# Altium PCB PCB_DIY.PcbDoc
Units mm, origin at the board's own origin, x right, y up, seen from the top; angles counter-clockwise.
Board outline 90 x 70 mm, 2 copper layers (Top Layer, Bottom Layer); 12 components, 10 nets, 77 pads, 0 vias.
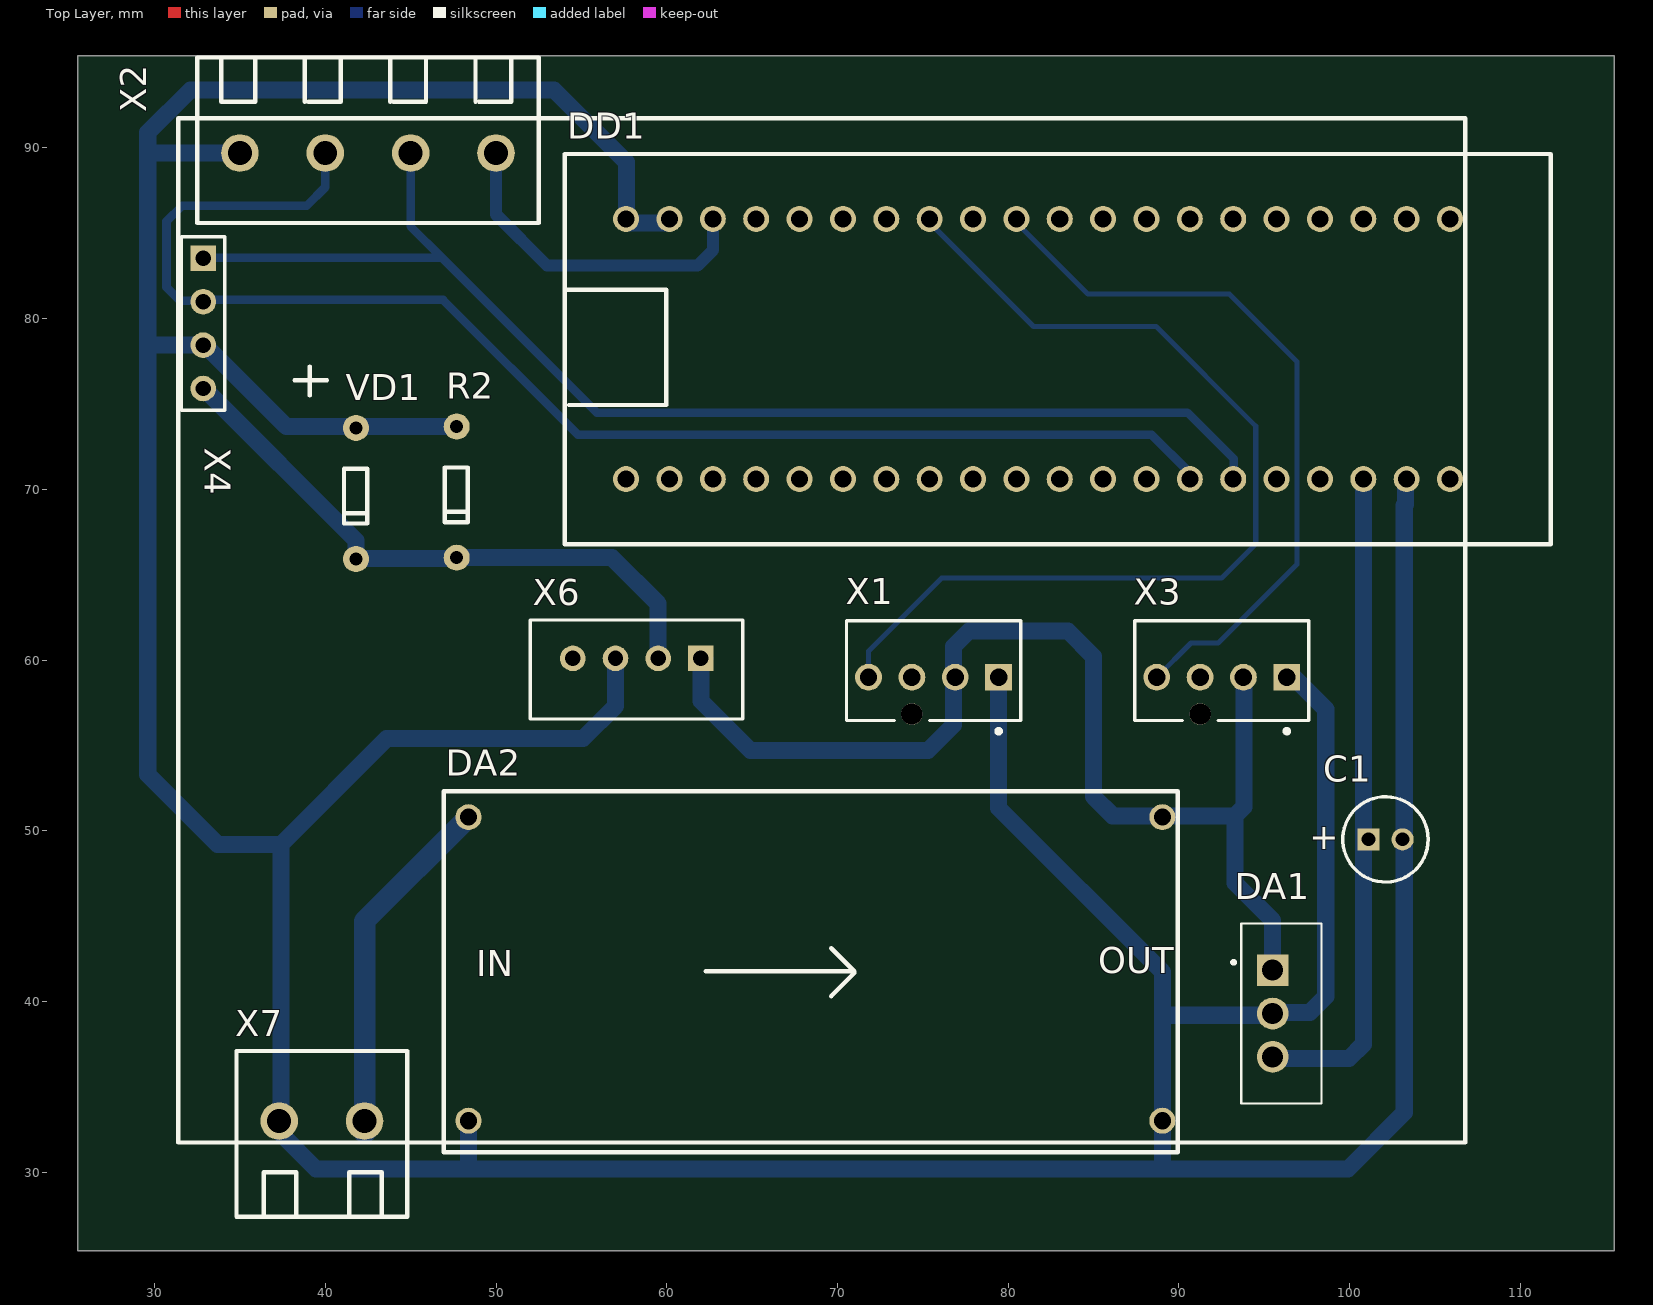
[diagram p0: Top Layer view]
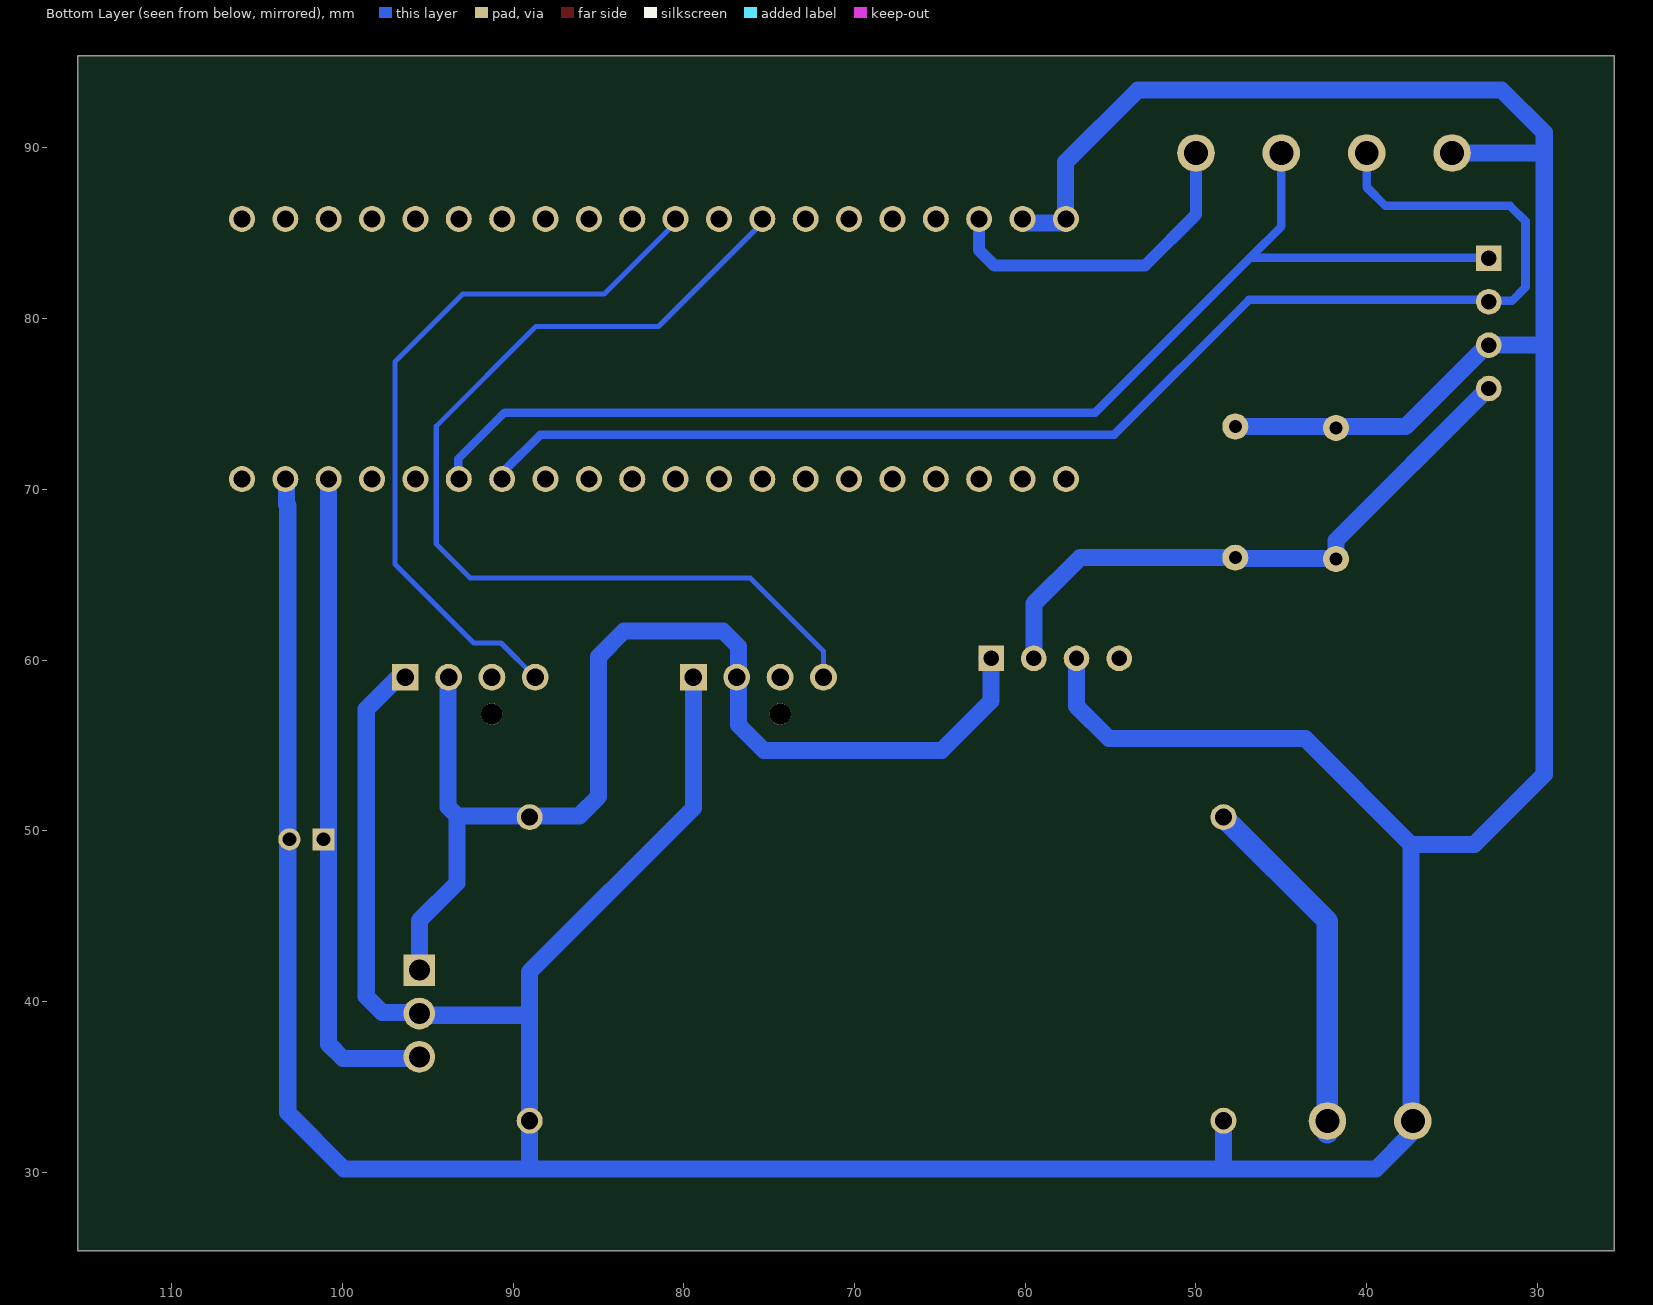
[diagram p1: Bottom Layer view, seen from below]

## Layer stack, top to bottom
Top Solder: solder mask 0.0102, Solder Resist, Dk 3.5
Top Layer: signal copper 0.0356
Dielectric 1: dielectric 0.32, FR-4, Dk 4.8
Bottom Layer: signal copper 0.0356
Bottom Solder: solder mask 0.0102, Solder Resist, Dk 3.5

## Board outline
25.5,25.4 25.5,95.4 115.5,95.4 115.5,25.4

## Design rules (kind name [scope] priority, off if disabled: settings)
Clearance [All] p1: gap=0.1 ignorepadtopadclearanceinfootprint=FALSE except(0: Arc-Hole Track-Hole SMDPad-Hole THPad-Hole Via-Hole Fill-Hole Poly-Hole Region-Hole Text-Hole)
PolygonConnect [All] p1: connectstyle=Relief reliefconductorwidth=0.254 reliefentries=4 polygonreliefangle="90 Angle" airgapwidth=0.254
RoutingVias [All] p1: holewidth=0.711 width=1.27 viastyle="Through Hole" minholewidth=0.711 minwidth=1.27 maxholewidth=0.711 maxwidth=1.27
SolderMaskExpansion [All] p1: expansion=0.102
Width [All] p1: maxlimit=10.254 minlimit=0.254 preferedwidth=0.254
30 further rules are at their usual default settings.

## Components (designator, comment, footprint, x,y, rotation, side; value= is the part's Value field where it differs from the comment)
C1 "K50-35 1uF" "K50-35 5x11x2" 102.1,49.5 r180 top
DA1 "КР142ЕН5А" TO220-short 96,39.3 r270 top
DA2 "DC_DC_LM2596HVS" DC_DC_LM2596HVS 48.387,33.02 r0 top
DD1 "STM32F103_BLUEPILL" STM32F103_BLUEPILL 105.88,85.84 r90 top
R2 "7.5k 1%" THROU_HOLE2.54 47.7,73.68 r270 top
VD1 "BZX55C3V3" THROU_HOLE2.54 41.8,73.6 r270 top
X1 "Conn_Molex_47053-1000_eec" Molex_47053-1000_0 75.63,59.38 r90 top
X2 "300-041-12" 300-041-12 35,89.7 r0 top
X3 "" Molex_47053-1000_0 92.51,59.38 r90 top
X4 "DS1021_1x4" PLD1X4 32.85,83.53 r270 top
X6 "DS1069-4M" "DS1069-4 CWF-4 CONNFLY" 62,60.1 r180 top
X7 "300-021-12" 300-021-12 42.3,33 r180 top

## Footprints (in the part's own frame and the unit in brackets; to place one, negate y for a bottom-side part, rotate by r counter-clockwise, add the part's x,y. Pads: shape width x height; smd on the part's side, far side on the other; paste and mask are expansions set on the pad)
300-021-12 [mm] "klemmnik 2"
  round 2.2 hole 1.4: 1(0,0) 2(5,0)
  silkscreen extent -2.5,-4.1 7.5,5.6, body extent -2.7,-3.9 7.8,5.1, height 12.5
300-041-12 [mm] "klemmnik 2"
  round 2.2 hole 1.4: 1(15,0) 2(10,0) 3(5,0) 4(0,0)
  silkscreen extent -2.5,-4.1 17.5,5.6, body extent -2.4,-3.9 17.9,5.1, height 12.5
DC_DC_LM2596HVS [mil] "DC step down converter"
  round 60 hole 39.37: 1(0,700) 2(0,0) 3(1600,700) 4(1600,0)
  silkscreen extent -57,-73 1636,760, body extent -57,-73 1636,760, height 591
"DS1069-4 CWF-4 CONNFLY" [mm]
  rect 1.5x1.5 hole 0.9: 1(0,0)
  round 1.5 hole 0.9: 2(2.5,0) 3(5,0) 4(7.5,0)
  silkscreen extent -2.45,-2.25 10,3.55, body extent -2.5,-2.25 10,3.5, height 7
"K50-35 5x11x2" [mm]
  rect 1.3x1.3 hole 0.8: 1(1,0)
  round 1.3 hole 0.8: 2(-1,0)
  silkscreen extent -2.5,-2.5 2.5,2.5, body extent -2.53,-2.53 2.53,2.53, height 11.53
Molex_47053-1000_0 [mm]
  rect 1.57x1.57 hole 1.02 paste-1000 mask+0: 1(-0.38,-3.81)
  round 1.57 hole 1.02 paste-1000 mask+0: 2(-0.38,-1.27) 3(-0.38,1.27) 4(-0.38,3.81)
  round 1.25 hole 1.25 unplated paste-1000 mask+0: ""(-2.54,1.27)
  silkscreen extent -3.67,-5.1 2.92,5.1, body extent -3.26,-5.3 3.02,5.3, height 0.25
PLD1X4 [mm]
  rect 1.5x1.5 hole 0.9: 1(0,0)
  round 1.5 hole 0.9: 2(2.54,0) 3(5.08,0) 4(7.62,0)
  silkscreen extent -1.27,-1.27 8.89,1.27, body extent -1.28,-1.27 8.88,1.27, height 8.6
STM32F103_BLUEPILL [mil] "STM32F103_BLUEPILL"
  round 60 hole 39.37: 1(0,0) 2(0,100) 3(0,200) 4(0,300) 7(0,1600) 10(0,400) 11(0,500) 12(0,600) 13(0,700) 14(0,800) 15(0,900) 16(0,1000) 17(0,1100) 18(0,1200) 19(0,1300) 21(0,1400) 22(0,1500) 25(-600,1900) 26(-600,1800) 27(-600,1700) 28(-600,1600) 29(-600,1500) 30(-600,1400) 31(-600,1300) 32(-600,1200) 33(-600,1100) 38(-600,1000) 39(-600,900) 40(-600,800) 41(-600,700) 42(-600,600) 43(-600,500) 45(-600,400) 46(-600,300) 58(0,1700) 59(0,1800) 60(0,1900) 61(-600,100) 62(-600,200) 63(-600,0)
  silkscreen extent -750,-232 150,2041, body extent -751,-232 149,2034, height 503
THROU_HOLE2.54 [mil]
  round 60 hole 30: 1(0,0) 2(302.36,0)
  silkscreen extent 94,-28 220,26
TO220-short [mm]
  rect 1.86x1.86 hole 1.24: 1(-2.54,-0.51)
  round 1.86 hole 1.24: 2(0,-0.51) 3(2.54,-0.51)
  silkscreen extent -5.27,-2.9 5.27,2.35, body extent -5.94,-2.26 5.94,2.14, height 19.11

## Part data
C1: library part K50-35mini, "Конденсатор электролитический алюминиевый"
DA1: "Cтабилизатор напряжения положительной полярности с выходным / напряжением 5 В"
DA2: "DC Step down conenter. Iput 4.5..50V ,Output 3..40V"
R2: library part RES_THROUHOLE, "Throu hole resistor"
VD1: "Stabilitron 3.3V"
X1: "CONN 4 Positions Header, Unshrouded Connector 0.100\" (2.54mm) Through Hole Tin", Current=4.0A, Digikey Part Number=WM4330-ND, Manufacturer=Molex, Mouser Part Number=538-47053-1000, Package=CONN_4P254L, Part Number=47053-1000, Temperature="0°C to +75°C", Temperature Range High=+75°C, Temperature Range Low=0°C, Voltage=250V, ComponentLink1Description=Upverter, ComponentLink1URL=https://upverter.com/upn/revision/17f438354fec4bac/, ComponentLink2Description=Datasheet, ComponentLink2URL=http://www.molex.com/webdocs/datasheets/pdf/en-us//0470531000_PCB_HEADERS.pdf, Contact Type="Male Pin", Digikey Description="CONN 4 Positions Header, Unshrouded Connector 0.100\" (2.54mm) Through Hole Tin", helpURL=https://upverter.com/upn/revision/17f438354fec4bac/, Ipc Land Pattern Name=HDRV4W65P_1X4_1020X65X1350, Lead Free=yes, Mounting Style="Through Hole", Pitch=2.54mm, RoHS=TRUE, Supplier 1=Digi-Key, Supplier 2=Mouser, Supplier Part Number 1=WM4330-ND, Supplier Part Number 2=538-47053-1000
X2: "Клеммник винтовой, 4-контактный, 5мм, прямой"
X3: library part 47053-1000, "CONN 4 Positions Header, Unshrouded Connector 0.100\" (2.54mm) Through Hole Tin", Current=4.0A, Digikey Part Number=WM4330-ND, Manufacturer=Molex, Mouser Part Number=538-47053-1000, Package=CONN_4P254L, Temperature="0°C to +75°C", Temperature Range High=+75°C, Temperature Range Low=0°C, Voltage=250V, ComponentLink1Description=Upverter, ComponentLink1URL=https://upverter.com/upn/revision/17f438354fec4bac/, ComponentLink2Description=Datasheet, ComponentLink2URL=http://www.molex.com/webdocs/datasheets/pdf/en-us//0470531000_PCB_HEADERS.pdf, Contact Type="Male Pin", Digikey Description="CONN 4 Positions Header, Unshrouded Connector 0.100\" (2.54mm) Through Hole Tin", helpURL=https://upverter.com/upn/revision/17f438354fec4bac/, Ipc Land Pattern Name=HDRV4W65P_1X4_1020X65X1350, Lead Free=yes, Mounting Style="Through Hole", Part Number=47053-1000, Pitch=2.54mm, RoHS=TRUE, Supplier 1=Digi-Key, Supplier 2=Mouser, Supplier Part Number 1=WM4330-ND, Supplier Part Number 2=538-47053-1000
X4: "Вилка штыревая 2.54мм 1x4 прямая тип1"
X6: library part DS1069-4, "Вилка на плату 2.50мм"
X7: "Klemmnik 2"

## Nets (pads, with @x,y where several pads share a name; then routed paths per layer and width w, separated by ;. In a path a pad name is that pad's centre, name@x,y a point inside that pad or via, vN(x,y) a via of type N, cw(c..) or ccw(c..) an arc to the next point about the centre after c; other vN are vias at no path point)
+3.3: DD1.58 X2.1 | length 19.5
  Bottom Layer w0.7: X2.1 50,86.1 53,83.1 61.8,83.1 62.72,84.02 DD1.58@62.72,85.6
+5: C1.1 DA1.3 DD1.62 | length 38.6
  Bottom Layer w1: DA1.3@95.52,36.63 95.49,36.66 99.96,36.66 100.8,37.5 100.8,70.34 DD1.62@100.82,70.36
+12: DA1.1 DA2.3 X1.2 X3.2 X6.1 | length 68
  Bottom Layer w1: X6.1@62.24,60.1 62,59.86 62,57.6 64.9,54.7 75.3,54.7 76.804,56.204 76.804,60.804 77.7,61.7 83.5,61.7 85,60.2 85,52 86.12,50.88 93.28,50.88 ; X3.2@93.8,58.62 93.8,51.4 93.28,50.88 ; DA1.1@95.49,41.74 95.49,44.74 93.28,46.95 93.28,50.88
+48: DA2.1 X7.1 | length 21
  Bottom Layer w1.254: X7.1@42.3,32.3 42.3,44.713 DA2.1
GND: C1.2 DA1.2 DA2.2 DA2.4 DD1.59 DD1.60 DD1.61 R2.1 VD1.1 X1.1 X2.4 X3.1 X4.3 X6.3 X7.2 | length 322.3
  Bottom Layer w1: X2.4 29.7,89.7 29.6,89.6 ; R2.1 37.72,73.68 32.9,78.5 X4.3 29.65,78.45 29.6,78.4 ; DA2.2@48.4,33.1 48.4,30.2 ; X6.3@57,59.8 57,57.3 55.1,55.4 43.6,55.4 37.4,49.2 ; DD1.59@60.18,85.6 57.64,85.6 57.64,89.16 53.4,93.4 32.1,93.4 29.6,90.9 29.6,89.6 ; X1.1@79.44,59.1 79.44,51.34 89.04,41.74 89.04,39.1 ; X3.1@96.72,59 98.6,57.12 98.6,40.3 97.665,39.365 95.655,39.365 95.49,39.2 89.14,39.2 89.04,39.1 ; DD1.61@103.36,70.36 103.26,70.26 103.26,69.118 103.2,69.058 103.2,33.5 99.9,30.2 89.04,30.2 ; 29.6,78.4 29.6,53.3 33.7,49.2 37.4,49.2 ; 29.6,78.4 29.6,89.6 ; 37.4,49.2 37.4,32.26 39.46,30.2 48.4,30.2 ; 48.4,30.2 89.04,30.2 ; 89.04,30.2 89.04,39.1
NetDD1_16: DD1.16 X3.4 | length 42.6
  Bottom Layer w0.3: DD1.16@80.5,85.6 84.667,81.433 92.967,81.433 96.906,77.494 96.906,65.606 92.3,61 90.7,61 X3.4
NetDD1_18: DD1.18 X1.4 | length 57.6
  Bottom Layer w0.3: X1.4@71.82,59.1 71.82,60.52 76.1,64.8 92.5,64.8 94.5,66.8 94.5,73.7 88.667,79.533 81.487,79.533 DD1.18@75.42,85.6
SCL: DD1.42 X2.3 X4.2 | length 81.1
  Bottom Layer w0.5: X2.3 40,87.7 38.9,86.6 31.6,86.6 30.7,85.7 30.7,81.834 31.494,81.04 32.9,81.04 32.96,81.1 46.9,81.1 54.8,73.2 88.4,73.2 90.6,71 DD1.42@90.6,70.3
SDA: DD1.43 X2.2 X4.1 | length 73.5
  Bottom Layer w0.5: X4.1@32.9,83.58 46.82,83.58 ; X2.2 45,85.4 46.82,83.58 ; DD1.43@93.2,70.36 93.2,71.8 90.5,74.5 55.9,74.5 46.82,83.58
WS: R2.2 VD1.2 X4.4 X6.2 | length 35.7
  Bottom Layer w1: X4.4@32.936,75.864 41.8,67 VD1.2 41.84,65.96 47.66,65.96 R2.2 56.8,66 59.5,63.3 X6.2
pads on no net: DD1.1 DD1.2 DD1.3 DD1.4 DD1.7 DD1.10 DD1.11 DD1.12 DD1.13 DD1.14 DD1.15 DD1.17 DD1.19 DD1.21 DD1.22 DD1.25 DD1.26 DD1.27 DD1.28 DD1.29 DD1.30 DD1.31 DD1.32 DD1.33 DD1.38 DD1.39 DD1.40 DD1.41 DD1.45 DD1.46 DD1.63 X1. X1.3 X3. X3.3 X6.4

## Silkscreen, mask and mechanical layers (free items; w line width, h text height)
Top Overlay:
  lines w0.254: 38.2,76.4 40.1,76.4 ; 39.1,75.5 39.1,77.2 ; 31.38,31.74 31.38,91.74 106.78,91.74 106.78,31.74 31.38,31.74
Mechanical 15:
  the board outline again, w0.4

## Text inside footprints (layer, text, board x,y; h text height)
C1: Top Overlay "+" at 99.35,50.2 h1.5 r180
DA2: Top Overlay "OUT" at 85.287,41.67 h1.52; Top Overlay "IN" at 48.837,41.47 h1.52
X2: Mechanical 1 "Front" at 50.1,94.6 h1.2 r180; Mechanical 1 "Front" at 40.1,94.6 h1.2 r180
X7: Mechanical 1 "Front" at 37.2,28.1 h1.2